# Altium PCB GE-Switch.PcbDoc
Units mil, origin at the board's own origin, x right, y up, seen from the top; angles counter-clockwise.
Board outline 3275 x 1867 mil, 4 copper layers (Top1, Gnd2, Signal3, Bottom4), stack 30.634 mil thick; 90 components, 86 nets, 430 pads, 7 vias.
Unrouted connection lines stored in the file: 264.
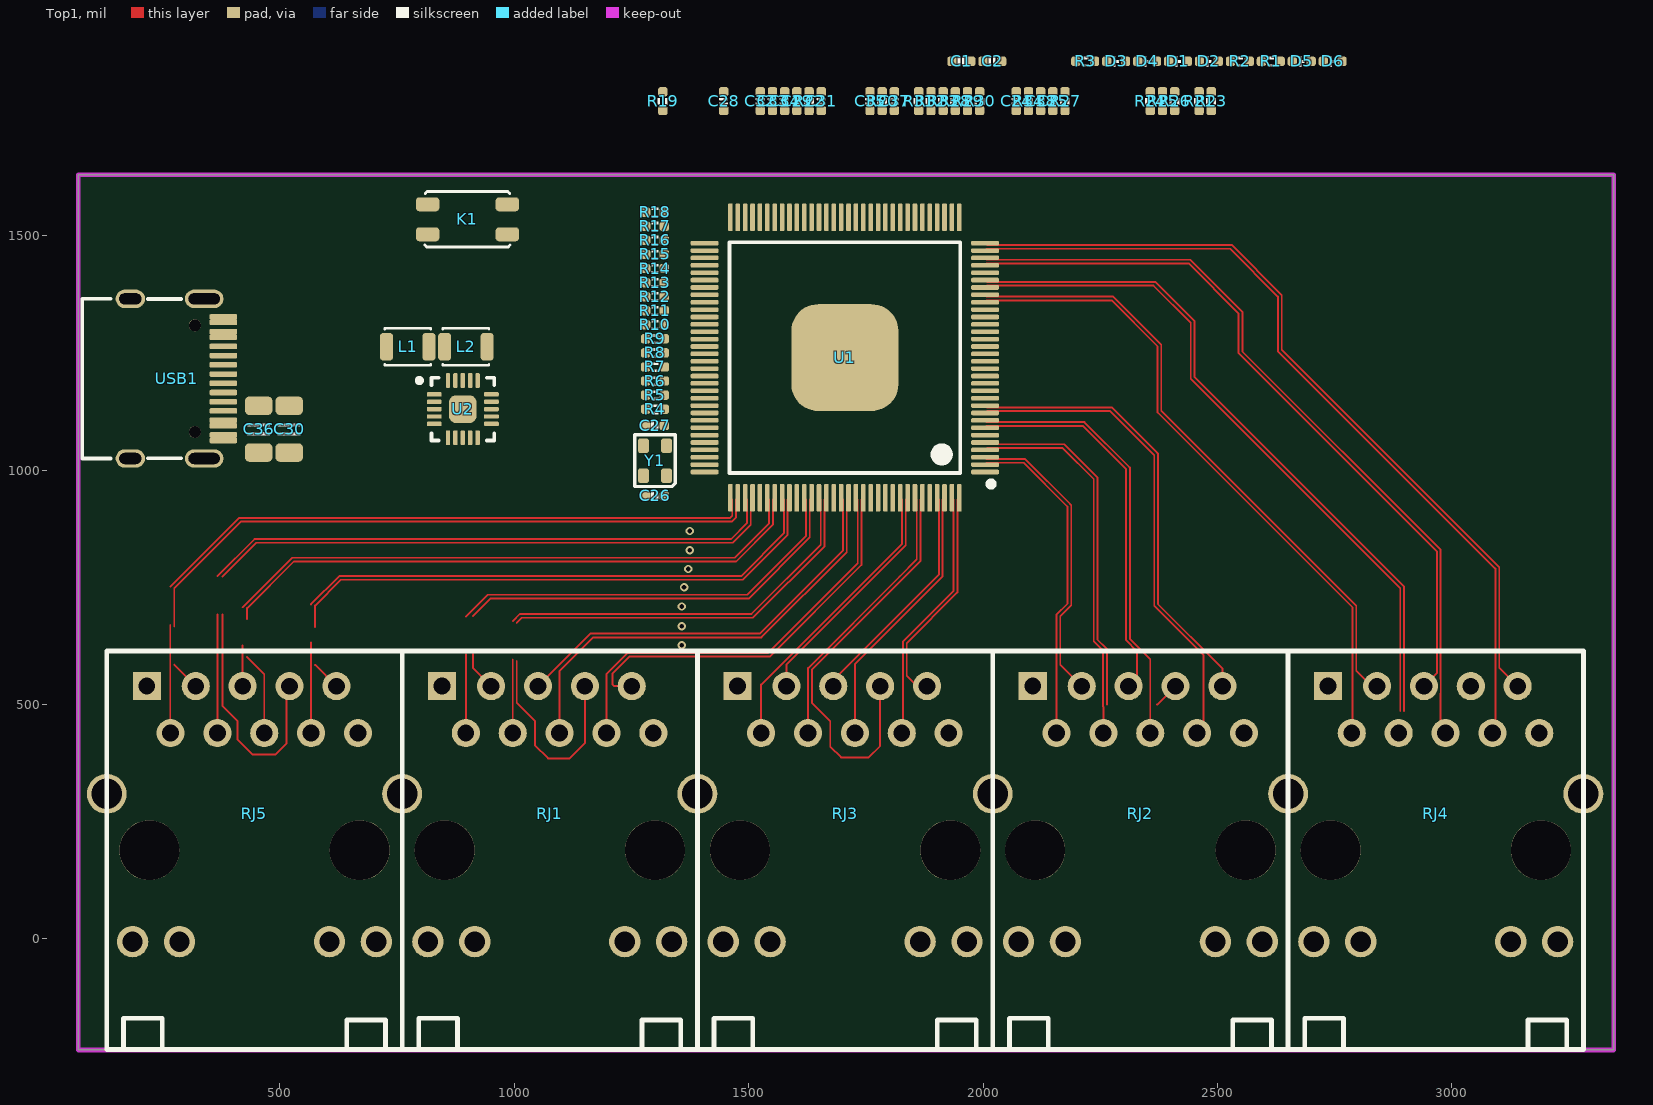
[diagram p0: Top1 view]
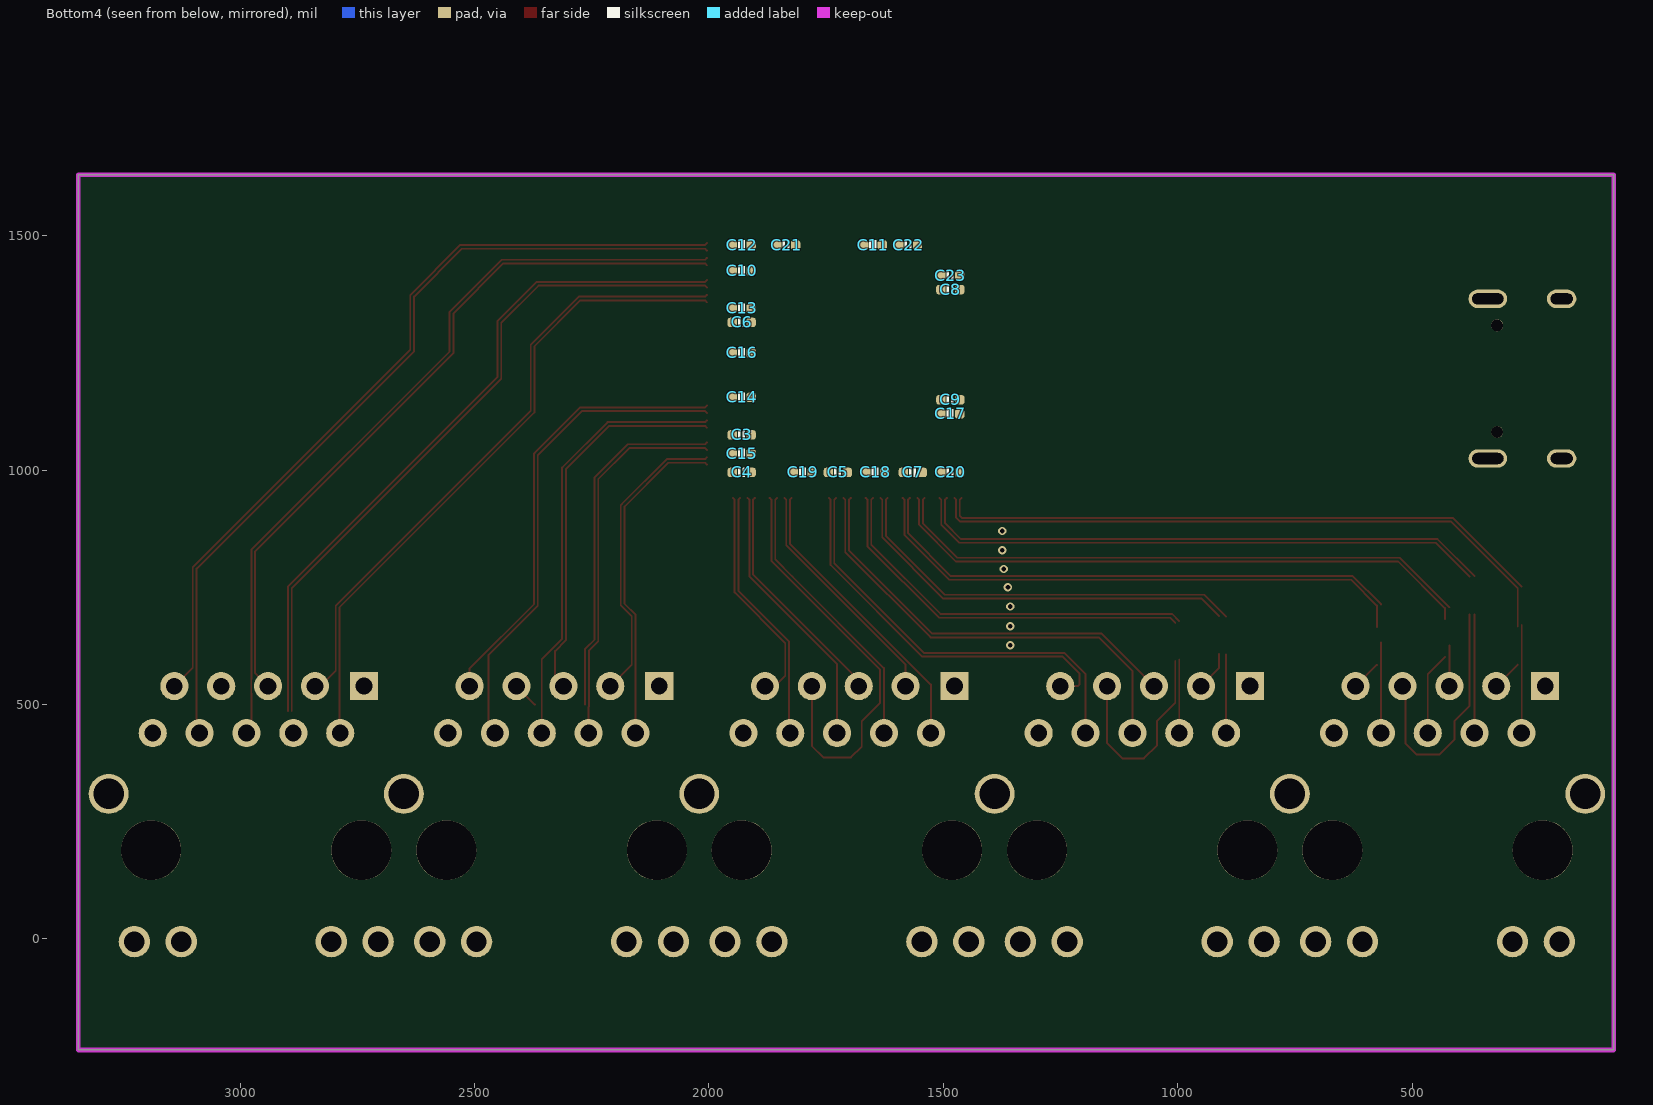
[diagram p1: Bottom4 view, seen from below]

## Layer stack, top to bottom
Top Solder: solder mask 0.4, Solder Resist, Dk 3.5
Top1: signal copper 1.4
Dielectric1: core 10, FR-4, Dk 4.2
Gnd2: signal copper 1.417
Dielectric3: core 10, Dk 4.2
Signal3: signal copper 1.417
Dielectric2: prepreg 5, Dk 4.2
Bottom4: signal copper 1.4
Bottom Solder: solder mask 0.4, Solder Resist, Dk 3.5

## Board outline
70,-237 70,1630 3345,1630 3345,-237

## Design rules (kind name [scope] priority, off if disabled: settings)
Clearance [All] p1: gap=4 ignorepadtopadclearanceinfootprint=FALSE except(0: Arc-Hole Track-Hole SMDPad-Hole THPad-Hole Via-Hole Fill-Hole Poly-Hole Region-Hole Text-Hole)
ComponentClearance [All] p1: gap=0 collisioncheckmode=3 verticalgap=0 showdistances=FALSE
DiffPairsRouting [All] p1: maxlimit=9 minlimit=4 mostfreqgap=4 toplayer_minwidth=4 toplayer_maxwidth=15 toplayer_prefwidth=4 midlayer1_minwidth=4 midlayer1_maxwidth=15 midlayer1_prefwidth=4 midlayer2_minwidth=4 midlayer2_maxwidth=15 midlayer2_prefwidth=4 bottomlayer_minwidth=4 bottomlayer_maxwidth=15 bottomlayer_prefwidth=4 maxuncoupledlength=500
FanoutControl Fanout_BGA [All] p1: bgadir=Out bgaviamode=Centered fanoutstyle=Auto fanoutdirection=Alternating viagrid=1 // Fanout_BGA (Default Rule)
HoleSize [All] p1: absolutevalues=TRUE maxlimit=10000 minlimit=8 maxpercent=80.000 minpercent=20.000
MinimumSolderMaskSliver [All] p1 off: minsoldermaskwidth=2
PlaneClearance [All] p1: clearance=8
PlaneConnect [All] p1: planeconnectstyle=Direct reliefexpansion=20 reliefentries=4 reliefconductorwidth=10 reliefairgap=10
PolygonConnect [All] p1: connectstyle=Direct reliefconductorwidth=10 reliefentries=4 polygonreliefangle="90 Angle" airgapwidth=10
RoutingVias [All] p1: holewidth=8 width=16 viastyle="Through Hole" minholewidth=6 minwidth=12 maxholewidth=28 maxwidth=50
SilkToSilkClearance [All] p1: silktosilkclearance=0
SilkToSolderMaskClearance [IsPad] p1: minsilkscreentomaskgap=0 clearancetoexposedcopper=TRUE
SolderMaskExpansion [All] p1: expansion=3 istentingtop=FALSE
Width GND [(InNet('AGND') OR InNet('GND'))] p1: maxlimit=50 minlimit=4 preferedwidth=10
Width VCC [(InNet('VDD_SYS_3.3V') OR InNet('VDD_AV_3.3V') OR InNet('VDD_5V') OR InNet('VDD1V2-SYS') OR InNet('VDD1V1-EPHY') OR InNet('VDD-CPUX') OR InNet('VDD-CPUS') OR InNet('VDD-CPUFB') OR InNet('VCC-DRAM'))] p2: maxlimit=50 minlimit=4 preferedwidth=10
Width [All] p3: maxlimit=10000 minlimit=4 preferedwidth=4
21 further rules are at their usual default settings.

## Classes and differential pairs
net class P4: P4A_RJ45_N P4A_RJ45_P P4B_RJ45_N P4B_RJ45_P P4C_RJ45_N P4C_RJ45_P P4D_RJ45_N P4D_RJ45_P
net class P3: P3A_RJ45_N P3A_RJ45_P P3B_RJ45_N P3B_RJ45_P P3C_RJ45_N P3C_RJ45_P P3D_RJ45_N P3D_RJ45_P
net class P2: P2A_RJ45_N P2A_RJ45_P P2B_RJ45_N P2B_RJ45_P P2C_RJ45_N P2C_RJ45_P P2D_RJ45_N P2D_RJ45_P
net class P1: P1A_RJ45_N P1A_RJ45_P P1B_RJ45_N P1B_RJ45_P P1C_RJ45_N P1C_RJ45_P P1D_RJ45_N P1D_RJ45_P
net class P0: P0A_RJ45_N P0A_RJ45_P P0B_RJ45_N P0B_RJ45_P P0C_RJ45_N P0C_RJ45_P P0D_RJ45_N P0D_RJ45_P
net class Power: AVDDH AVDDL GND
net class SHIELD: SHIELD
differential pair P4D_RJ45: +P4D_RJ45_P -P4D_RJ45_N
differential pair P4C_RJ45: +P4C_RJ45_P -P4C_RJ45_N
differential pair P4B_RJ45: +P4B_RJ45_P -P4B_RJ45_N
differential pair P4A_RJ45: +P4A_RJ45_P -P4A_RJ45_N
differential pair P3D_RJ45: +P3D_RJ45_P -P3D_RJ45_N
differential pair P3C_RJ45: +P3C_RJ45_P -P3C_RJ45_N
differential pair P3B_RJ45: +P3B_RJ45_P -P3B_RJ45_N
differential pair P3A_RJ45: +P3A_RJ45_P -P3A_RJ45_N
differential pair P2D_RJ45: +P2D_RJ45_P -P2D_RJ45_N
differential pair P2C_RJ45: +P2C_RJ45_P -P2C_RJ45_N
differential pair P2B_RJ45: +P2B_RJ45_P -P2B_RJ45_N
differential pair P2A_RJ45: +P2A_RJ45_P -P2A_RJ45_N
differential pair P1D_RJ45: +P1D_RJ45_P -P1D_RJ45_N
differential pair P1C_RJ45: +P1C_RJ45_P -P1C_RJ45_N
differential pair P1B_RJ45: +P1B_RJ45_P -P1B_RJ45_N
differential pair P1A_RJ45: +P1A_RJ45_P -P1A_RJ45_N
differential pair P0D_RJ45: +P0D_RJ45_P -P0D_RJ45_N
differential pair P0C_RJ45: +P0C_RJ45_P -P0C_RJ45_N
differential pair P0B_RJ45: +P0B_RJ45_P -P0B_RJ45_N
differential pair P0A_RJ45: +P0A_RJ45_P -P0A_RJ45_N

## Components (designator, comment, footprint, x,y, rotation, side; value= is the part's Value field where it differs from the comment)
C1 "10nF" CAP_0402 1953.71,1872 r0 top value=0.1u
C2 "10nF" CAP_0402 2019.71,1872 r0 top value=0.1u
C3 "0.1uF" CAP_0402 1930,1075 r0 bottom value=0.1u
C4 "0.1uF" CAP_0402 1930,995 r180 bottom value=0.1u
C5 "0.1uF" CAP_0402 1725,995 r180 bottom value=0.1u
C6 "0.1uF" CAP_0402 1930,1315 r0 bottom value=0.1u
C7 "0.1uF" CAP_0402 1565,995 r180 bottom value=0.1u
C8 "0.1uF" CAP_0402 1485,1385 r180 bottom value=0.1u
C9 "0.1uF" CAP_0402 1485,1150 r180 bottom value=0.1u
C10 "0.1uF" CAP_0402 1930,1425 r0 bottom value=0.1u
C11 "0.1uF" CAP_0402 1650,1480 r180 bottom value=0.1u
C12 "0.1uF" CAP_0402 1930,1480 r180 bottom value=0.1u
C13 "0.1uF" CAP_0402 1930,1345 r180 bottom value=0.1u
C14 "0.1uF" CAP_0402 1930,1155 r180 bottom value=0.1u
C15 "0.1uF" CAP_0402 1930,1035 r180 bottom value=0.1u
C16 "0.1uF" CAP_0402 1930,1250 r180 bottom value=0.1u
C17 "0.1uF" CAP_0402 1485,1120 r0 bottom value=0.1u
C18 "0.1uF" CAP_0402 1645,995 r0 bottom value=0.1u
C19 "0.1uF" CAP_0402 1800,995 r180 bottom value=0.1u
C20 "0.1uF" CAP_0402 1485,995 r0 bottom value=0.1u
C21 "0.1uF" CAP_0402 1835,1480 r180 bottom value=0.1u
C22 "0.1uF" CAP_0402 1575,1480 r180 bottom value=0.1u
C23 "0.1uF" CAP_0402 1485,1415 r0 bottom value=0.1u
C24 "10nF" CAP_0402 2070.71,1787 r90 top value=0.1u
C25 "10nF" CAP_0402 2148.71,1787 r90 top value=0.1u
C26 "22pF" CAP_0402 1300,945 r0 top value=0.1u
C27 "22pF" CAP_0402 1300,1095 r180 top value=0.1u
C28 "10uF" CAP_0402 1446.71,1787 r90 top value=0.1u
C29 "0.1uF" CAP_0402 1602.71,1787 r90 top value=0.1u
C30 "100uF" 1206-CAP 519.72,1087.31 r90 top value=0.1u
C31 "10uF" CAP_0402 1654.71,1787 r90 top value=0.1u
C32 "0.1uF" CAP_0402 1524.71,1787 r90 top value=0.1u
C33 "0.1uF" CAP_0402 1550.71,1787 r90 top value=0.1u
C34 "10uF" CAP_0402 1576.71,1787 r90 top value=0.1u
C35 "0.1uF" CAP_0402 1758.71,1787 r90 top value=0.1u
C36 "100uF" 1206-CAP 454.66,1087.31 r90 top value=0.1u
C37 "0.1uF" CAP_0402 1810.71,1787 r90 top value=0.1u
C38 "10nF" CAP_0402 2122.71,1787 r90 top value=0.1u
D1 "color?" LED_0402_RED 2415.71,1872 r0 top
D2 "color?" LED_0402_RED 2481.71,1872 r0 top
D3 "color?" LED_0402_RED 2283.71,1872 r0 top
D4 "color?" LED_0402_RED 2349.71,1872 r0 top
D5 "color?" LED_0402_RED 2679.71,1872 r0 top
D6 "color?" LED_0402_RED 2745.71,1872 r0 top
K1 "TACT 4P" ButtonTACT_3.5*3.55_90 900,1535 r0 top value=3.4x3.5
L1 "2.2uH" 2520-L 772.54,1263.13 r0 top
L2 "2.2uH" 2520-L 896.65,1263.13 r0 top
R1 "470R" RES_0402 2613.71,1872 r0 top value=22R
R2 "470R" RES_0402 2547.71,1872 r0 top value=22R
R3 "2.49K" RES_0402 2217.71,1872 r0 top value=22R
R4 "4.7K" RES_0402 1300,1130 r180 top value=22R
R5 "4.7K" RES_0402 1300,1160 r180 top value=22R
R6 "4.7K" RES_0402 1300,1190 r180 top value=22R
R7 "4.7K" RES_0402 1300,1220 r180 top value=22R
R8 "4.7K" RES_0402 1300,1250 r180 top value=22R
R9 "4.7K" RES_0402 1300,1280 r180 top value=22R
R10 "4.7K" RES_0402 1300,1310 r180 top value=22R
R11 "4.7K" RES_0402 1300,1340 r180 top value=22R
R12 "4.7K" RES_0402 1300,1370 r180 top value=22R
R13 "4.7K" RES_0402 1300,1400 r180 top value=22R
R14 "4.7K" RES_0402 1300,1430 r180 top value=22R
R15 "4.7K" RES_0402 1300,1460 r180 top value=22R
R16 "4.7K" RES_0402 1300,1490 r180 top value=22R
R17 "4.7K" RES_0402 1300,1520 r180 top value=22R
R18 "4.7K" RES_0402 1300,1550 r180 top value=22R
R19 "470R" RES_0402 1316.71,1787 r90 top value=22R
R20 "470R" RES_0402 1784.71,1787 r90 top value=22R
R21 "67K" RES_0402 2460.71,1787 r90 top value=22R
R22 "470R" RES_0402 1628.71,1787 r90 top value=22R
R23 "100K" RES_0402 2486.71,1787 r90 top value=22R
R24 "0R" RES_0402 2356.71,1787 r90 top value=22R
R25 "1K" RES_0402 2382.71,1787 r90 top value=22R
R26 "0R" RES_0402 2408.71,1787 r90 top value=22R
R27 "1K" RES_0402 2174.71,1787 r90 top value=22R
R28 "510K" RES_0402 1940.71,1787 r90 top value=22R
R29 "110K" RES_0402 1966.71,1787 r90 top value=22R
R30 "1K" RES_0402 1992.71,1787 r90 top value=22R
R31 "10K" RES_0402 1862.71,1787 r90 top value=22R
R32 "1K" RES_0402 1888.71,1787 r90 top value=22R
R33 "1K" RES_0402 1914.71,1787 r90 top value=22R
R34 "1K" RES_0402 2096.71,1787 r90 top value=22R
RJ1 "HR911130A" RJ45-TH_HR911130A 1075.6,266.62 r180 top locked
RJ2 "HR911130A" RJ45-TH_HR911130A 2335.6,266.62 r180 top locked
RJ3 "HR911130A" RJ45-TH_HR911130A 1705.6,266.62 r180 top locked
RJ4 "HR911130A" RJ45-TH_HR911130A 2965.6,266.62 r180 top locked
RJ5 "HR911130A" RJ45-TH_HR911130A 445.6,266.62 r180 top locked
U1 "RTL8367RB-VB-CG" LQFP-128 1705,1240 r90 top locked
U2 "EA3036" QFN-20 890,1130 r0 top
USB1 "Type-C" Type-C-TOP 280,1195 r180 top
Y1 "25MHz" 晶振2520 1300,1020 r90 top

## Footprints (in the part's own frame and the unit in brackets; to place one, negate y for a bottom-side part, rotate by r counter-clockwise, add the part's x,y. Pads: shape width x height; smd on the part's side, far side on the other; paste and mask are expansions set on the pad)
1206-CAP [mm]
  rrect50% 1x1.5 smd: 1(-1.27,0) 2(1.27,0)
  silkscreen extent -0.3,-0.61 0.3,0.61, body extent -1.5,-0.75 1.5,0.75, height 1.5
2520-L [mm]
  rrect50% 0.7x1.5 smd: 1(-1.15,0) 2(1.15,0)
  silkscreen extent -1.25,-1 1.25,1, body extent -1,-0.6 1,0.6, height 0.92
ButtonTACT_3.5*3.55_90 [mil]
  rrect50% 50x30 smd: 1(-85,32) 2(-85,-32) 3(85,32) 4(85,-32)
  silkscreen extent -91,-59 91,59, body extent -90,-55 91,85, height 56
CAP_0402 [mil]
  rrect50% 20x20 smd: 1(-20,0) 2(20,0)
  silkscreen extent -6,-9 6,9, body extent -20,-10 20,10, height 20
LED_0402_RED [mil]
  rrect50% 20x20 smd: 1(-20,0) 2(20,0)
  silkscreen extent -6,-10 6,10, body extent -20,-10 20,10, height 18
LQFP-128 [mm]
  rrect50% 0.25x1.5 smd: 1(-6.2,-7.6) 2(-5.799,-7.6) 3(-5.4,-7.6) 4(-5.001,-7.6) 5(-4.6,-7.6) 6(-4.201,-7.6) 7(-3.8,-7.6) 8(-3.401,-7.6) 9(-3,-7.6) 10(-2.601,-7.6) 11(-2.2,-7.6) 12(-1.801,-7.6) 13(-1.4,-7.6) 14(-1.001,-7.6) 15(-0.599,-7.6) 16(-0.201,-7.6) 17(0.201,-7.6) 18(0.599,-7.6) 19(1.001,-7.6) 20(1.4,-7.6) 21(1.801,-7.6) 22(2.2,-7.6) 23(2.601,-7.6) 24(3,-7.6) 25(3.401,-7.6) 26(3.8,-7.6) 27(4.201,-7.6) 28(4.6,-7.6) 29(5.001,-7.6) 30(5.4,-7.6) 31(5.799,-7.6) 32(6.2,-7.6) 65(6.2,7.6) 66(5.799,7.6) 67(5.4,7.6) 68(5.001,7.6) 69(4.6,7.6) 70(4.201,7.6) 71(3.8,7.6) 72(3.401,7.6) 73(3,7.6) 74(2.601,7.6) 75(2.2,7.6) 76(1.801,7.6) 77(1.4,7.6) 78(1.001,7.6) 79(0.599,7.6) 80(0.201,7.6) 81(-0.201,7.6) 82(-0.599,7.6) 83(-1.001,7.6) 84(-1.4,7.6) 85(-1.801,7.6) 86(-2.2,7.6) 87(-2.601,7.6) 88(-3,7.6) 89(-3.401,7.6) 90(-3.8,7.6) 91(-4.201,7.6) 92(-4.6,7.6) 93(-5.001,7.6) 94(-5.4,7.6) 95(-5.799,7.6) 96(-6.2,7.6)
  rrect50% 1.5x0.25 smd: 33(7.6,-6.2) 34(7.6,-5.799) 35(7.6,-5.4) 36(7.6,-5.001) 37(7.6,-4.6) 38(7.6,-4.201) 39(7.6,-3.8) 40(7.6,-3.401) 41(7.6,-3) 42(7.6,-2.601) 43(7.6,-2.2) 44(7.6,-1.801) 45(7.6,-1.4) 46(7.6,-1.001) 47(7.6,-0.599) 48(7.6,-0.201) 49(7.6,0.201) 50(7.6,0.599) 51(7.6,1.001) 52(7.6,1.4) 53(7.6,1.801) 54(7.6,2.2) 55(7.6,2.601) 56(7.6,3) 57(7.6,3.401) 58(7.6,3.8) 59(7.6,4.201) 60(7.6,4.6) 61(7.6,5.001) 62(7.6,5.4) 63(7.6,5.799) 64(7.6,6.2) 97(-7.6,6.2) 98(-7.6,5.799) 99(-7.6,5.4) 100(-7.6,5.001) 101(-7.6,4.6) 102(-7.6,4.201) 103(-7.6,3.8) 104(-7.6,3.401) 105(-7.6,3) 106(-7.6,2.601) 107(-7.6,2.2) 108(-7.6,1.801) 109(-7.6,1.4) 110(-7.6,1.001) 111(-7.6,0.599) 112(-7.6,0.201) 113(-7.6,-0.201) 114(-7.6,-0.599) 115(-7.6,-1.001) 116(-7.6,-1.4) 117(-7.6,-1.801) 118(-7.6,-2.2) 119(-7.6,-2.601) 120(-7.6,-3) 121(-7.6,-3.401) 122(-7.6,-3.8) 123(-7.6,-4.201) 124(-7.6,-4.6) 125(-7.6,-5.001) 126(-7.6,-5.4) 127(-7.6,-5.799) 128(-7.6,-6.2)
  rrect50% 5.8x5.8 smd: 129(0,0)
  silkscreen extent -7,-8.07 6.25,6.25, body extent -8,-8 8,8, height 1.6
QFN-20 [mm] "QFN, 20-Leads, Body 3.00x3.00mm, Pitch 0.40mm, Thermal Pad 1.65x1.65mm, IPC Medium Density"
  rrect50% 0.8x0.24 smd: 1(-1.55,0.8) 2(-1.55,0.4) 3(-1.55,0) 4(-1.55,-0.4) 5(-1.55,-0.8) 11(1.55,-0.8) 12(1.55,-0.4) 13(1.55,0) 14(1.55,0.4) 15(1.55,0.8)
  rrect50% 0.24x0.8 smd: 6(-0.8,-1.55) 7(-0.4,-1.55) 8(0,-1.55) 9(0.4,-1.55) 10(0.8,-1.55) 16(0.8,1.55) 17(0.4,1.55) 18(0,1.55) 19(-0.4,1.55) 20(-0.8,1.55)
  rrect50% 1.5x1.5 smd: 21(0,0)
  silkscreen extent -2.47,-1.7 1.7,1.7, body extent -1.56,-1.56 1.56,1.56, height 0.8
RES_0402 [mil]
  rrect50% 20x20 smd: 1(-20,0) 2(20,0)
  silkscreen extent -6,-10 6,10, body extent -20,-10 20,10, height 14
RJ45-TH_HR911130A [mil]
  round 66.93 hole 43.31: 11(260,272.62) 12(160,272.62) 13(-160,272.62) 14(-260,272.62)
  rect 60x60 hole 35.83: P1(229.63,-272.62)
  round 60 hole 35.83: P2(179.1,-172.38) P3(125.2,-272.38) P4(79.1,-172.38) P5(25.2,-272.38) P6(-20.9,-172.38) P7(-74.8,-272.38) P8(-120.9,-172.38) P9(-174.8,-272.38) P10(-220.9,-172.38)
  round 85 hole 65: SHIELD0(-315,-42.48) SHIELD1(315,-42.48)
  round 127.95 hole 127.95 unplated: ""(-224.41,77.62) ""(224.4,77.62)
  silkscreen extent -315,-347 315,503
Type-C-TOP [mm]
  round 0.65 hole 0.65: 0(-0.98,2.89) 0(-0.98,-2.89)
  oval 1.6x1 hole 0.6 slot 1.2 at 0 deg: 1(2.52,4.325) 2(2.52,-4.325)
  oval 2.1x1 hole 0.6 slot 1.7 at 0 deg: 3(-1.48,-4.325) 4(-1.48,4.325)
  rrect50% 1.5x0.3 smd: A1(-2.52,-3.35) A4(-2.52,-2.55) A5(-2.52,-1.25) A6(-2.52,-0.25) A7(-2.52,0.25) A8(-2.52,1.25) A9(-2.52,2.55) A12(-2.52,3.35) B1(-2.52,3.05) B4(-2.52,2.25) B5(-2.52,1.75) B6(-2.52,0.75) B7(-2.52,-0.75) B8(-2.52,-1.75) B9(-2.52,-2.25) B12(-2.52,-3.05)
  silkscreen extent -0.22,-4.33 5.12,4.33, body extent -2.57,-4.48 5.18,4.48, height 3.26
晶振2520 [mm]
  rrect50% 0.8x0.6 smd: 1(-0.81,-0.625) 2(0.81,-0.625) 3(0.81,0.625) 4(-0.81,0.625)
  silkscreen extent -1.4,-1.1 1.4,1.1, body extent -1.3,-1.05 1.3,1.05, height 0.55

## Part data
C1 C2 C3 C4 C5 C6 C7 C8 C9 C10 C11 C12 C13 C14 C15 C16 C17 C18 C19 C20 C21 C22 C23 C24 C25 C26 C27 C28 C29 C31 C32 C33 C34 C35 C37 C38: library part 电容-0402, "Capacitor"
C30 C36: library part 电容-1206, "Capacitor"
D1 D2 D3 D4 D5 D6: library part LED_0402, "LED", Type=0402
K1: library part ButtonTACT, "Button", Type="TACT 4P"
L1 L2: library part 电感-2520, "磁珠"
R1 R2 R3 R4 R5 R6 R7 R8 R9 R10 R11 R12 R13 R14 R15 R16 R17 R18 R19 R20 R21 R22 R23 R24 R25 R26 R27 R28 R29 R30 R31 R32 R33 R34: library part 电阻-0402, "Resistor"
RJ1 RJ2 RJ3 RJ4 RJ5: BOM_Manufacturer=HANRUN, BOM_Manufacturer Part=HR911130A, BOM_Supplier=LCSC, BOM_Supplier Part=C54408, spicePre=R, spiceSymbolName=HR911130A
U2: "EA3036 is a 3CH power management IC for applications powered by one Li-Ion battery or a DC 5V adapter."
USB1: library part USB-Type-C-TOP
Y1: library part 晶振-4Pin-无源, "2520无源", Package="SMD-6 ECS International", Availability=Unavailable, MF="ECS International", MP=ECS-3225S30-240-EN-TR, Price="0.75 USD"
U1: Contributor=libc0607, link=https://www.realtek.com/en/products/communications-network-ics/item/rtl8367rb-vb-cg, spicePre=U, spiceSymbolName=RTL8367RB-VB-CG

## Via types
v1: diameter 18, hole 10, Top1 to Bottom4, tented both sides, 7 vias

## Nets (pads, with @x,y where several pads share a name; then routed paths per layer and width w, separated by ;. In a path a pad name is that pad's centre, name@x,y a point inside that pad or via, vN(x,y) a via of type N, cw(c..) or ccw(c..) an arc to the next point about the centre after c; other vN are vias at no path point)
AVDDH: C12.1 C13.1 C14.1 C15.1 C16.1 C17.1 C18.1 C19.1 C20.1 C21.1 C22.1 C23.1 C34.1 C35.1 C36.2 L2.2 R4.2 R5.2 R6.2 R7.2 R9.2 R10.2 R11.2 R12.2 R14.2 R15.2 R16.2 R17.2 R18.2 R28.2 R30.1 R31.2 R32.1 R33.1 R34.1 U1.1 U1.11 U1.17 U1.18 U1.23 U1.33 U1.36 U1.39 U1.54 U1.55 U1.69 U1.70 U1.88 U1.96 U1.106 U1.119
AVDDL: C3.2 C4.2 C5.2 C6.2 C7.2 C8.2 C9.2 C10.2 C11.2 C28.1 C29.1 C30.2 L1.2 R21.2 R24.2 R26.2 U1.6 U1.14 U1.21 U1.28 U1.53 U1.71 U1.87 U1.101 U1.111 U1.124
GND: C1.1 C2.1 C3.1 C4.1 C5.1 C6.1 C7.1 C8.1 C9.1 C10.1 C11.1 C12.2 C13.2 C14.2 C15.2 C16.2 C17.2 C18.2 C19.2 C20.2 C21.2 C22.2 C23.2 C24.1 C25.1 C26.1 C27.1 C28.2 C29.2 C30.1 C31.1 C32.2 C33.2 C34.2 C35.2 C36.1 C37.2 C38.1 D1.2 D2.2 D6.2 K1.2 K1.4 R3.2 R8.2 R13.2 R23.1 R29.1 U1.12 U1.46 U1.47 U1.48 U1.49 U1.50 U1.51 U1.52 U1.56 U1.63 U1.64 U1.65 U1.66 U1.67 U1.68 U1.118 U1.129 U2.1 U2.4 U2.5 U2.12 U2.13 U2.15 U2.17 U2.18 U2.21 USB1.1 USB1.2 USB1.3 USB1.4 USB1.A1 USB1.A12 USB1.B1 USB1.B12 Y1.2 Y1.4
NetC1_2: C1.2 RJ1.P1
NetC2_2: C2.2 RJ2.P1
NetC24_2: C24.2 RJ3.P1
NetC25_2: C25.2 RJ4.P1
NetC38_2: C38.2 RJ5.P1
NetD1_1: D1.1 R25.2
NetD2_1: D2.1 R27.2
NetD3_1: D3.1 R30.2
NetD4_1: D4.1 R32.2
NetD5_1: D5.1 R33.2
NetD6_1: D6.1 R34.2
NetL1_1: L1.1 U2.11
NetL2_1: L2.1 U2.6
NetR1_2: R1.2 RJ1.12 RJ1.14
NetR2_2: R2.2 RJ2.12 RJ2.14
NetR3_1: R3.1 U1.13
NetR19_2: R19.2 RJ3.12 RJ3.14
NetR20_2: R20.2 RJ4.12 RJ4.14
NetR21_1: R21.1 R23.2 U2.14
NetR22_2: R22.2 RJ5.12 RJ5.14
NetR28_1: R28.1 R29.2 U2.3
P0A_RJ45_N: RJ5.P3 U1.98 | length 1451.5
  Top1 w4: 274.49,584.9 RJ5.P3 ; 274.49,665.9 274.49,748.18 416.31,890 1464,890 1472.8,898.8 1472.8,936.9 U1.98
P0A_RJ45_P: RJ5.P2 U1.97 | length 1532.2
  Top1 w4: RJ5.P2@266,439.5 266,670 ; 266,751 413,898 1460.69,898 1464.8,902.11 1464.8,936.9 U1.97
P0B_RJ45_N: RJ5.P7 U1.100 | length 1755.4
  Top1 w4: 377,691.69 377,497 409,465 409,426 442,393 490,393 514,417 RJ5.P7@514,532.61 ; 377,772.69 449.31,845 1466,845 1504.25,883.25 1504.25,936.95 U1.100
P0B_RJ45_P: RJ5.P4 U1.99 | length 1485.9
  Top1 w4: RJ5.P4 366.49,692.49 ; 366.49,773.49 446,853 1462.69,853 1496.25,886.56 1496.25,936.95 U1.99
P0C_RJ45_N: RJ5.P6 U1.103 | length 1454.9
  Top1 w4: 430,601 466.49,564.51 RJ5.P6 ; 430,682 430,705.69 529.31,805 1473,805 1551.5,883.5 1551.5,936.9 U1.103
P0C_RJ45_P: RJ5.P5 U1.102 | length 1340.4
  Top1 w4: RJ5.P5 420.4,626.4 ; 420.4,707.4 526,813 1469.69,813 1543.5,886.81 1543.5,936.9 U1.102
P0D_RJ45_N: RJ5.P9 U1.105 | length 1260.8
  Top1 w4: 575,584.4 RJ5.P9 ; 575,665.4 575,711 630,766 1487,766 1583,862 1583,936.9 U1.105
P0D_RJ45_P: RJ5.P8 U1.104 | length 1341.9
  Top1 w4: RJ5.P8@566,439.5 566,632.31 ; 566,713.31 626.69,774 1483.69,774 1575,865.31 1575,936.9 U1.104
P0LED0: D3.2 R4.1 U1.86
P0LED1: R5.1 R22.1 U1.85
P0LED2: R6.1 RJ5.11 RJ5.13 U1.84
P1A_RJ45_N: RJ1.P3 U1.108 | length 958.6
  Top1 w4: 912,608 912,577.4 RJ1.P3 ; 912,689 949,726 1500,726 1630.25,856.25 1630.25,936.95 U1.108
P1A_RJ45_P: RJ1.P2 U1.107 | length 1047.4
  Top1 w4: RJ1.P2 896.49,606.49 ; 896.49,687.49 943,734 1496.69,734 1622.25,859.56 1622.25,936.95 U1.107
P1B_RJ45_N: RJ1.P7 U1.110 | length 1278.4
  Top1 w4: 1005,593 1005,504 1044,465 1044,413 1072,385 1118,385 1150.4,417.4 RJ1.P7 ; 1005,674 1016,685 1509,685 1661.75,837.75 1661.75,936.95 U1.110
P1B_RJ45_P: RJ1.P4 U1.109 | length 983.8
  Top1 w4: RJ1.P4 996.49,596.49 ; 996.49,677.49 1012,693 1505.69,693 1653.75,841.06 1653.75,936.95 U1.109
P1C_RJ45_N: RJ1.P6 U1.113 | length 967.4
  Top1 w4: RJ1.P6 1096.49,571.49 1168,643 1527,643 1709,825 1709,936.9 U1.113
P1C_RJ45_P: RJ1.P5 U1.112 | length 884.5
  Top1 w4: RJ1.P5 1162.39,651 1523.69,651 1701,828.31 1701,936.9 U1.112
P1D_RJ45_N: RJ1.P9 U1.115 | length 838.4
  Top1 w4: RJ1.P9 1213,539 1209,543 1209,566 1245,602 1545,602 1740.5,797.5 1740.5,936.9 U1.115
P1D_RJ45_P: RJ1.P8 U1.114 | length 901.2
  Top1 w4: RJ1.P8 1196.49,564.81 1241.69,610 1541.69,610 1732.5,800.81 1732.5,936.9 U1.114
P1LED0: R8.1 R25.1 U1.82
P1LED1: R1.1 R7.1 U1.83
P1LED2: R9.1 RJ1.11 RJ1.13 U1.81
P2A_RJ45_N: RJ3.P3 U1.121 | length 508.9
  Top1 w4: RJ3.P3 1580.39,585.08 1835,839.69 1835,843 1835,936.9 U1.121
P2A_RJ45_P: RJ3.P2 U1.120 | length 627.9
  Top1 w4: RJ3.P2 1526.49,542.49 1827,843 1827,936.9 U1.120
P2B_RJ45_N: RJ3.P7 U1.123 | length 898.4
  Top1 w4: RJ3.P7 1780.39,411.4 1756,387 1697,387 1674,410 1674,464 1634.66,503.34 1634.66,574.34 1825.31,765 1866.5,806.19 1866.5,936.9 U1.123
P2B_RJ45_P: RJ3.P4 U1.122 | length 599.5
  Top1 w4: RJ3.P4 1626.49,577.49 1822,773 1858.5,809.5 1858.5,936.9 U1.122
P2C_RJ45_N: RJ3.P6 U1.126 | length 581
  Top1 w4: RJ3.P6 1726.49,586.18 1913.75,773.44 1913.75,785.75 1913.75,936.95 U1.126
P2C_RJ45_P: RJ3.P5 U1.125 | length 496.7
  Top1 w4: RJ3.P5 1680.39,551.4 1905.75,776.75 1905.75,936.95 U1.125
P2D_RJ45_N: RJ3.P9 U1.128 | length 478.7
  Top1 w4: RJ3.P9 1859,539 1837,561 1837,630.69 1945.2,738.89 1945.2,936.9 U1.128
P2D_RJ45_P: RJ3.P8 U1.127 | length 545.7
  Top1 w4: RJ3.P8@1829,441.51 1829,634 1937.2,742.2 1937.2,936.9 U1.127
P2LED0: D4.2 R11.1 U1.79
P2LED1: R10.1 R19.1 U1.80
P2LED2: R12.1 RJ3.11 RJ3.13 U1.78
P3A_RJ45_N: RJ2.P3 U1.3 | length 641.1
  Top1 w4: U1.3 2008.05,1023.55 2089.76,1023.55 2185.66,927.66 2188,925.31 2188,711.69 2185.66,709.34 2164.49,688.18 2164.49,584.9 RJ2.P3
P3A_RJ45_P: RJ2.P2 U1.2 | length 708.9
  Top1 w4: U1.2 2008.05,1015.55 2086.45,1015.55 2180,922 2180,715 2156.49,691.49 2156.49,602.49 RJ2.P2
P3B_RJ45_N: RJ2.P7 U1.5 | length 819.3
  Top1 w4: U1.5 2008.1,1055 2173.31,1055 2241.66,986.66 2244,984.31 2244,638.31 2261.66,620.66 2264,618.31 2264,499.66 ; 2371.05,499.66 RJ2.P7
P3B_RJ45_P: RJ2.P4 U1.4 | length 811.7
  Top1 w4: U1.4 2008.1,1047 2170,1047 2236,981 2236,635 2256,615 2256,495 2257,494 2257,439.51 RJ2.P4
P3C_RJ45_N: RJ2.P6 U1.8 | length 938.2
  Top1 w4: U1.8 2008.05,1102.25 2216.06,1102.25 2310.66,1007.66 ; RJ2.P6 2356.49,596.82 2313,640.31 2313,1005.31 ; 2310.66,1007.66 2313,1005.31 ; 2310.66,1007.66 2313,1005.31
P3C_RJ45_P: RJ2.P5 U1.7 | length 820.4
  Top1 w4: U1.7 2008.05,1094.25 2212.75,1094.25 2305,1002 2305,637 2328,614 2328,556.61 RJ2.P5
P3D_RJ45_N: RJ2.P9 U1.10 | length 967.7
  Top1 w4: U1.10 2008.05,1133.75 2274.56,1133.75 2370.66,1037.66 ; RJ2.P9 2510.39,576.92 2373,714.31 2373,1035.31 ; 2370.66,1037.66 2373,1035.31 ; 2370.66,1037.66 2373,1035.31
P3D_RJ45_P: RJ2.P8 U1.9 | length 1043.3
  Top1 w4: U1.9 2008.05,1125.75 2271.25,1125.75 2365,1032 2365,711 2470,606 2470,452.51 RJ2.P8
P3LED0: R13.1 R27.1 U1.77
P3LED1: R2.1 R15.1 U1.75
P3LED2: R14.1 RJ2.11 RJ2.13 U1.76
P4A_RJ45_N: RJ4.P3 U1.25 | length 1345.6
  Top1 w4: U1.25 2008.1,1370 2277.31,1370 2377.66,1269.66 2380,1267.31 2380,1126.31 2796,710.31 2796,572 2829,539 RJ4.P3
P4A_RJ45_P: RJ4.P2 U1.24 | length 1407.9
  Top1 w4: U1.24 2008.1,1362 2274,1362 2372,1264 2372,1123 2788,707 2788,440.51 RJ4.P2
P4B_RJ45_N: RJ4.P7 U1.27 | length 1499.8
  Top1 w4: U1.27 2008.1,1401.5 2366.81,1401.5 2451,1317.31 2451,1198 2898,751 2898,486
P4B_RJ45_P: RJ4.P4 U1.26 | length 1486.5
  Top1 w4: U1.26 2008.1,1393.5 2363.5,1393.5 2443,1314 2443,1194.69 2890,747.69 2890,486
P4C_RJ45_N: RJ4.P6 U1.30 | length 1674.8
  Top1 w4: U1.30 2008.05,1448.75 2441.56,1448.75 2553,1337.31 2553,1253 2976,830 2976,554.31 2976.39,553.91 2976.39,524.09 2976,523.7 2976,449.5 RJ4.P6
P4C_RJ45_P: RJ4.P5 U1.29 | length 1568.3
  Top1 w4: U1.29 2008.05,1440.75 2438.25,1440.75 2545,1334 2545,1249.69 2968,826.69 2968,566.61 RJ4.P5
P4D_RJ45_N: RJ4.P9 U1.32 | length 1721.5
  Top1 w4: U1.32 2008.1,1480.2 2530.11,1480.2 2637,1373.31 2637,1257 3101,793 3101,578.4 RJ4.P9
P4D_RJ45_P: RJ4.P8 U1.31 | length 1794.6
  Top1 w4: U1.31 2008.1,1472.2 2526.8,1472.2 2629,1370 2629,1253.69 3093,789.69 3093,445.51 RJ4.P8
P4LED0: D5.2 R17.1 U1.73
P4LED1: R16.1 R20.1 U1.74
P4LED2: R18.1 RJ4.11 RJ4.13 U1.72
PLL0: C33.1 R26.1 U1.116
PLL1: C32.1 R24.1 U1.34
RST: C37.1 K1.1 K1.3 R31.1 U1.91
SHIELD: RJ1.P10 RJ1.SHIELD0 RJ1.SHIELD1 RJ2.P10 RJ2.SHIELD0 RJ2.SHIELD1 RJ3.P10 RJ3.SHIELD0 RJ3.SHIELD1 RJ4.P10 RJ4.SHIELD0 RJ4.SHIELD1 RJ5.P10 RJ5.SHIELD0 RJ5.SHIELD1
VUSB: C31.2 U2.7 U2.8 U2.9 U2.10 U2.16 U2.19 USB1.A4 USB1.A9 USB1.B4 USB1.B9
XTALI: C26.2 U1.90 Y1.1
XTALO: C27.2 U1.89 Y1.3
pads on no net: RJ1. RJ2. RJ3. RJ4. RJ5. U1.15 U1.16 U1.19 U1.20 U1.22 U1.35 U1.37 U1.38 U1.40 U1.41 U1.42 U1.43 U1.44 U1.45 U1.57 U1.58 U1.59 U1.60 U1.61 U1.62 U1.92 U1.93 U1.94 U1.95 U1.117 U2.2 U2.20 USB1.0 USB1.A5 USB1.A6 USB1.A7 USB1.A8 USB1.B5 USB1.B6 USB1.B7 USB1.B8
copper on no net:
  other v1: 1357,626 1357,667 1357,709 1362,750 1371,789 1374,829 1374,870

## Keep-outs
Keep-Out Layer:
  the board outline again, w10